# Altium PCB CORE_Prototype_1.PcbDoc
Units mil, origin at the board's own origin, x right, y up, seen from the top; angles counter-clockwise.
Board outline 1058.99 x 1049 mil, 2 copper layers (Top Layer, Bottom Layer); 29 components, 32 nets, 198 pads, 67 vias.
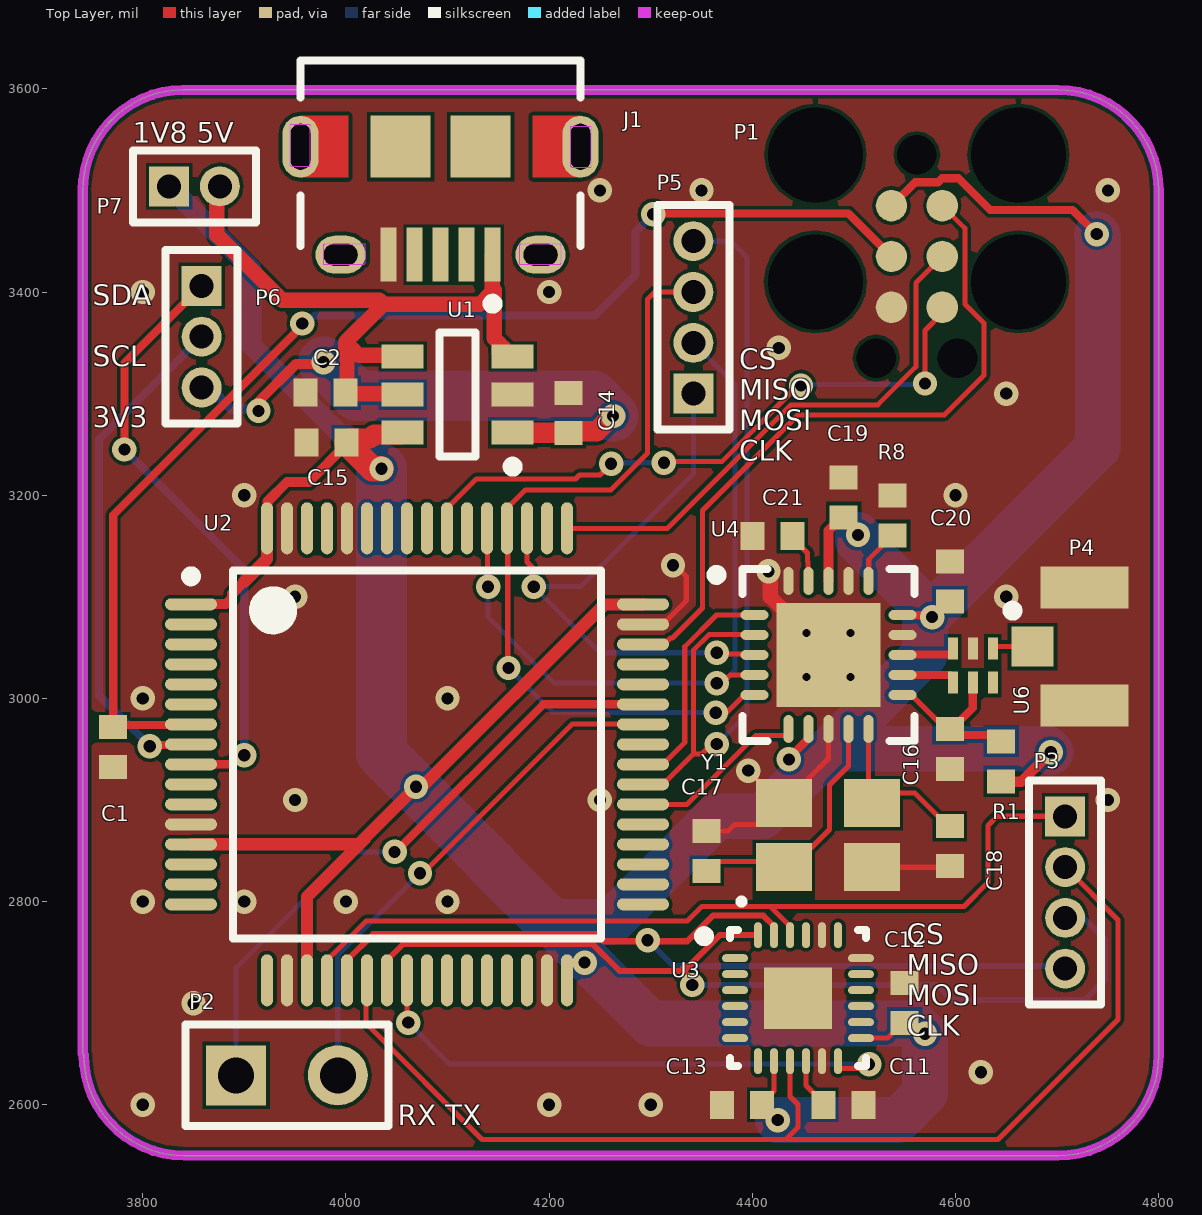
[diagram p0: Top Layer view]
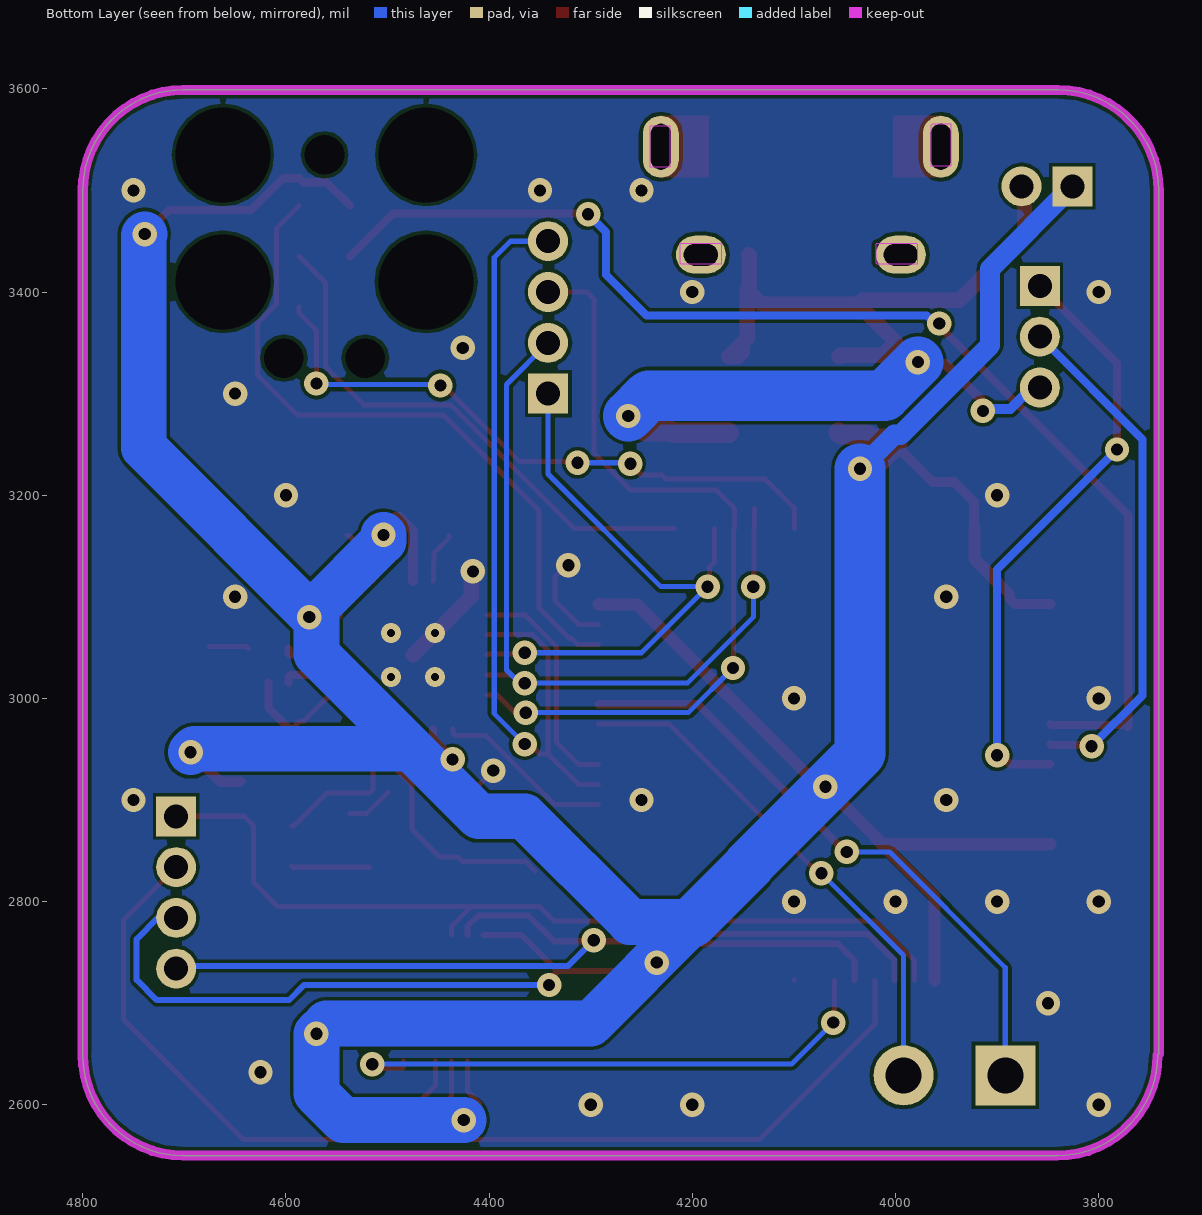
[diagram p1: Bottom Layer view, seen from below]
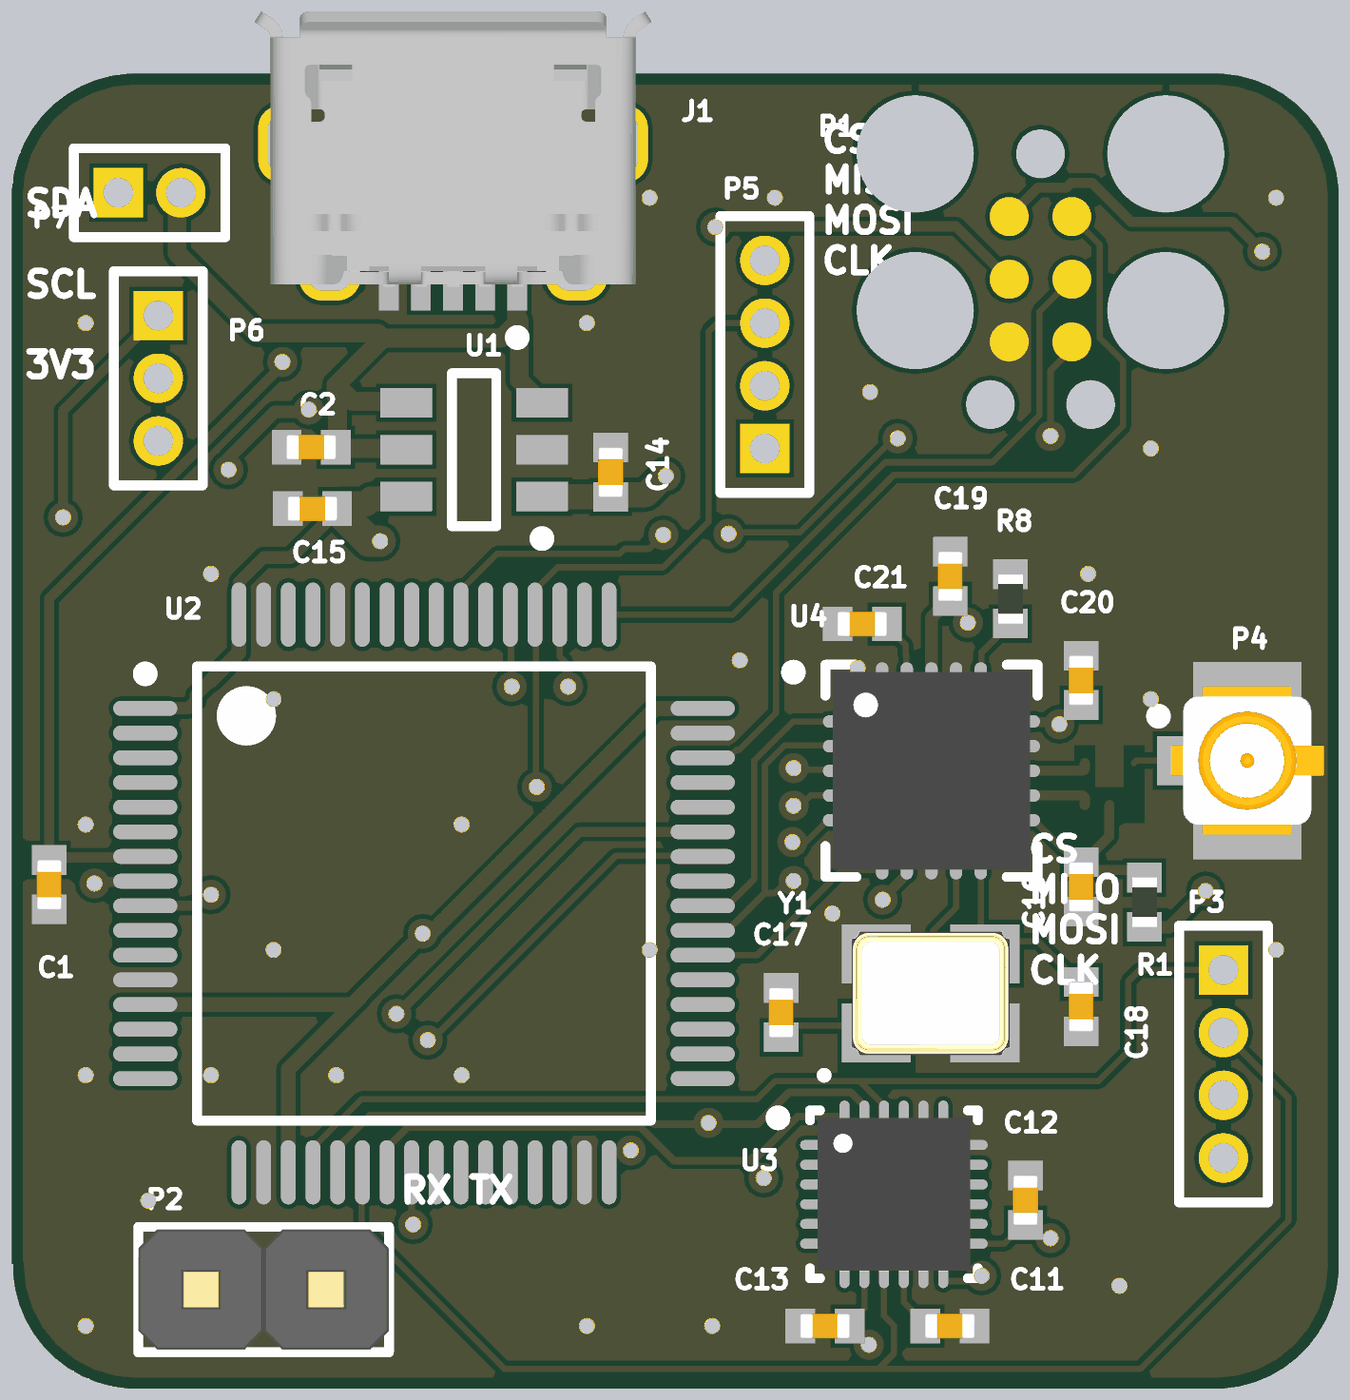
[diagram p2: 3D render of the assembled board from above, using the file's embedded part models]

## Layer stack, top to bottom
Top Solder: solder mask 0.4, Solder Resist, Dk 3.5
Top Layer: signal copper 1.4
Dielectric 1: dielectric 12.6, FR-4, Dk 4.8
Bottom Layer: signal copper 1.4
Bottom Solder: solder mask 0.4, Solder Resist, Dk 3.5

## Board outline
3741.01,2649.99 3741.01,3500.01 cw(c3840,3500.01) 3840,3599 3840.01,3598.99 4701.01,3598.99 cw(c4701.01,3500) 4800,3500 4799.99,3499.99 4799.99,2648.99 cw(c4701,2648.99) 4701,2550 4700.99,2550.01 3840.99,2550.01 cw(c3840.99,2649)

## Design rules (kind name [scope] priority, off if disabled: settings)
Clearance [All] p1: gap=3.5 ignorepadtopadclearanceinfootprint=FALSE
HoleToHoleClearance [All] p1: gap=0 allowstackedmicrovias=TRUE
MinimumSolderMaskSliver [All] p1: minsoldermaskwidth=0
PolygonConnect [All] p1: connectstyle=Direct reliefconductorwidth=10 reliefentries=4 polygonreliefangle="90 Angle" airgapwidth=10
RoutingVias [All] p1: holewidth=12 width=24 viastyle="Through Hole" minholewidth=12 minwidth=24 maxholewidth=28 maxwidth=50
SilkToSilkClearance [All] p1: silktosilkclearance=0
SilkToSolderMaskClearance [IsPad] p1: minsilkscreentomaskgap=0 clearancetoexposedcopper=TRUE
SolderMaskExpansion [All] p1: expansion=0
Width [All] p1: maxlimit=250 minlimit=5 preferedwidth=5
26 further rules are at their usual default settings.

## Classes and differential pairs
component class U_RADIO_nRF24L01: C16 C17 C18 C19 C20 C21 P4 P5 R1 R8 U4 U6 Y1
component class U_MAIN_STM32L476RGT6: C1 C2 C14 C15 J1 P1 P2 P6 P7 U1 U2
component class U_ACC_ICM20948: C11 C12 C13 P3 U3

## Components (designator, comment, footprint, x,y, rotation, side; value= is the part's Value field where it differs from the comment)
C1 "Cap" CAPC1005N 3771,2952 r90 top value=0.1uF
C2 "Cap" CAPC1005N 3980,3301 r0 top value=1uF
C11 "Cap" CAPC1005N 4489.69,2600 r180 top value=0.1uF
C12 "Cap" CAPC1005N 4550,2700.32 r270 top value=0.1uF
C13 "Cap" CAPC1005N 4390,2600 r0 top value=0.1uF
C14 "Cap" CAPC1005N 4219,3281 r270 top value=1uF
C15 "Cap" CAPC1005N 3981,3252 r0 top value=1uF
C16 "Cap" CAPC1005N 4594.37,2950.31 r90 top value=2.2nF
C17 "Cap" CAPC1005N 4355,2850 r270 top value=15pF
C18 "Cap" CAPC1005N 4594.37,2854.68 r90 top value=15pF
C19 "Cap" CAPC1005N 4490,3198 r270 top value=10nF
C20 "Cap" CAPC1005N 4594.37,3115 r270 top value=1nF
C21 "Cap" CAPC1005N 4419.68,3160 r0 top value=33nF
J1 "10118194-0001LF" FCI-10118194-0001LF-5_V 4093.2,3489.85 r180 top
P1 "DNI" TC2030 4562,3535 r270 top
P2 "Header 2" HDR1X2-PINS 3892,2629 r0 top
P3 "MHDR1X4" MHDR1X4 4708,2884 r270 top
P4 "BNC" MCB3-V4 4727,3051 r270 top
P5 "MHDR1X4" MHDR1X4 4342,3300 r90 top
P6 "MHDR1X3" MHDR1X3 3858,3406 r270 top
P7 "MHDR1X2" MHDR1X2 3826,3504 r0 top
R1 "Res1" RESC1005N 4645,2938 r270 top value=0
R8 "Res" RESC1005N 4538.03,3180 r270 top value=22k
U1 "AP7312-1833W6-7" SOT95P285X145-6N 4110,3299 r180 top
U2 "STM32L476RGT6" STM-LQFP64_N 4070,2945 r0 top
U3 "ICM-20948" TDK-QFN-24_L 4445,2705 r0 top
U4 "NRF24L01P-T" NRSC-QFN-20_L 4475,3042.83 r0 top
U6 "2450BM14A0002T" 2450BM14A0002 5325.66,3157.27 r0 top
Y1 "XTAL_4SMD" XTAL3225-4-N 4474.37,2865 r0 top

## Footprints (in the part's own frame and the unit in brackets; to place one, negate y for a bottom-side part, rotate by r counter-clockwise, add the part's x,y. Pads: shape width x height; smd on the part's side, far side on the other; paste and mask are expansions set on the pad)
2450BM14A0002 [mm]
  rect 0.25x0.55 smd: 1(-17.5,-2.75) 2(-18,-2.75) 3(-18.5,-2.75) 4(-18.5,-3.6) 5(-18,-3.6) 6(-17.5,-3.6)
CAPC1005N [mm] "Chip Capacitor (0402), Body 1.0x0.5mm, IPC Medium Density"
  rect 0.6x0.7 smd: 1(-0.5,0) 2(0.5,0)
  body extent -0.51,-0.26 0.51,0.26, height 0.61
FCI-10118194-0001LF-5_V [mm] "SMD, 5-Leads, Body 7x5mm, Pitch 0.65 mm"
  rect 0.4x1.35 smd: 1(-1.3,1.35) 2(-0.65,1.35) 3(0,1.35) 4(0.65,1.35) 5(1.3,1.35)
  oval 1.25x0.95 hole 0.55 slot 0.85 at 0 deg: 6(-2.5,1.35) 7(2.5,1.35)
  oval 0.9x1.55 hole 0.5 slot 1.15 at 90 deg: 8(-3.5,-1.35) 9(3.5,-1.35)
  rect 1.5x1.55 smd: 10(-1,-1.35) 11(1,-1.35)
  Top Layer region: -2.3,-2.125 -2.3,-0.575 -3.5,-0.575 -3.5,-2.125
  Top Layer region: 3.5,-2.125 3.5,-0.575 2.3,-0.575 2.3,-2.125
  silkscreen extent -3.5,-3.5 3.5,2.7, body extent -4.02,-4.03 4.02,1.55, height 2.72
HDR1X2-PINS [mm] "Connector; Header; 2 Position"
  rect 1.5x1.5 hole 0.9: 1(0,0)
  round 1.5 hole 0.9: 2(2.54,0)
  silkscreen extent -1.27,-1.27 3.81,1.27, body extent -1.27,-1.22 3.81,1.22, height 10.3
MCB3-V4 [mm] "Connector; RF Coaxial, MCB SM; 4 Position; Vertical, Body 3.1x3.0mm (LxW)"
  rect 1x1.05 smd: 1(0,-1.3)
  rect 1.05x2.2 smd: 2(-1.475,0) 2(1.475,0)
  silkscreen extent -1.02,-1.92 -0.78,-1.67, body extent -1.5,-1.55 1.5,1.55, height 1.25
MHDR1X2 [mm] "Connector; Header; 2 Position"
  rect 1x1 hole 0.6: 1(0,0)
  round 1 hole 0.6: 2(1.27,0)
  silkscreen extent -0.9,-0.9 2.17,0.9
MHDR1X3 [mm] "Connector; Header; 3 Position"
  rect 1x1 hole 0.6: 1(0,0)
  round 1 hole 0.6: 2(1.27,0) 3(2.54,0)
  silkscreen extent -0.9,-0.9 3.44,0.9
MHDR1X4 [mm] "Connector; Header; 4 Position"
  rect 1x1 hole 0.6: 1(0,0)
  round 1 hole 0.6: 2(1.27,0) 3(2.54,0) 4(3.81,0)
  silkscreen extent -0.9,-0.9 4.71,0.9
NRSC-QFN-20_L [mm] "QFN, 20-Leads, Body 4x4mm, Pitch 0.5mm, Thermal Pad 2.6x2.6mm, IPC High Density"
  oval 0.7x0.25 smd: 1(-1.85,1) 2(-1.85,0.5) 3(-1.85,0) 4(-1.85,-0.5) 5(-1.85,-1) 11(1.85,-1) 12(1.85,-0.5) 13(1.85,0) 14(1.85,0.5) 15(1.85,1)
  oval 0.25x0.7 smd: 6(-1,-1.85) 7(-0.5,-1.85) 8(0,-1.85) 9(0.5,-1.85) 10(1,-1.85) 16(1,1.85) 17(0.5,1.85) 18(0,1.85) 19(-0.5,1.85) 20(-1,1.85)
  rect 2.6x2.6 smd: 21(0,0)
  silkscreen extent -2.92,-2.15 2.15,2.15, body extent -2,-2 2,2, height 0.95
RESC1005N [mm] "Chip Resistor, Body 1.1x0.5mm, IPC Medium Density"
  rect 0.6x0.7 smd: 1(-0.5,0) 2(0.5,0)
  body extent -0.5,-0.25 0.5,0.25, height 0.35
SOT95P285X145-6N [mm] "SOT23, 6-Leads, Body 3.00x2.85mm, Pitch 0.95mm, IPC Medium Density"
  rect 1.05x0.6 smd: 1(-1.375,0.95) 2(-1.375,0) 3(-1.375,-0.95) 4(1.375,-0.95) 5(1.375,0) 6(1.375,0.95)
  silkscreen extent -1.5,-1.55 0.45,1.92, body extent -0.85,-1.55 0.85,1.55, height 1.45
STM-LQFP64_N [mm] "QFP, 64-Leads, Body 10x10mm, Pitch 0.5mm, IPC Medium Density"
  oval 1.3x0.3 smd: 1(-5.65,3.75) 2(-5.65,3.25) 3(-5.65,2.75) 4(-5.65,2.25) 5(-5.65,1.75) 6(-5.65,1.25) 7(-5.65,0.75) 8(-5.65,0.25) 9(-5.65,-0.25) 10(-5.65,-0.75) 11(-5.65,-1.25) 12(-5.65,-1.75) 13(-5.65,-2.25) 14(-5.65,-2.75) 15(-5.65,-3.25) 16(-5.65,-3.75) 33(5.65,-3.75) 34(5.65,-3.25) 35(5.65,-2.75) 36(5.65,-2.25) 37(5.65,-1.75) 38(5.65,-1.25) 39(5.65,-0.75) 40(5.65,-0.25) 41(5.65,0.25) 42(5.65,0.75) 43(5.65,1.25) 44(5.65,1.75) 45(5.65,2.25) 46(5.65,2.75) 47(5.65,3.25) 48(5.65,3.75)
  oval 0.3x1.3 smd: 17(-3.75,-5.65) 18(-3.25,-5.65) 19(-2.75,-5.65) 20(-2.25,-5.65) 21(-1.75,-5.65) 22(-1.25,-5.65) 23(-0.75,-5.65) 24(-0.25,-5.65) 25(0.25,-5.65) 26(0.75,-5.65) 27(1.25,-5.65) 28(1.75,-5.65) 29(2.25,-5.65) 30(2.75,-5.65) 31(3.25,-5.65) 32(3.75,-5.65) 49(3.75,5.65) 50(3.25,5.65) 51(2.75,5.65) 52(2.25,5.65) 53(1.75,5.65) 54(1.25,5.65) 55(0.75,5.65) 56(0.25,5.65) 57(-0.25,5.65) 58(-0.75,5.65) 59(-1.25,5.65) 60(-1.75,5.65) 61(-2.25,5.65) 62(-2.75,5.65) 63(-3.25,5.65) 64(-3.75,5.65)
  silkscreen extent -5.77,-4.6 4.6,4.6, body extent -5,-5 5,5, height 1.6
TC2030 [mil]
  round 31 smd paste-100: 1(50,-25) 2(50,25) 3(100,-25) 4(100,25) 5(150,-25) 6(150,25)
  round 0 hole 93.5 unplated paste+0: MH(0,100) MH(0,-100) MH(125,100) MH(125,-100)
  round 0 hole 39 unplated paste+0: MH(0,0) MH(200,-40) MH(200,40)
TDK-QFN-24_L [mm] "QFN, 24-Leads, Body 3.10x3.10mm, Pitch 0.40mm, Thermal Pad 1.70x1.54mm, IPC High Density"
  oval 0.65x0.2 smd: 1(-1.575,1) 2(-1.575,0.6) 3(-1.575,0.2) 4(-1.575,-0.2) 5(-1.575,-0.6) 6(-1.575,-1) 13(1.575,-1) 14(1.575,-0.6) 15(1.575,-0.2) 16(1.575,0.2) 17(1.575,0.6) 18(1.575,1)
  oval 0.2x0.65 smd: 7(-1,-1.575) 8(-0.6,-1.575) 9(-0.2,-1.575) 10(0.2,-1.575) 11(0.6,-1.575) 12(1,-1.575) 19(1,1.575) 20(0.6,1.575) 21(0.2,1.575) 22(-0.2,1.575) 23(-0.6,1.575) 24(-1,1.575)
  rect 1.7x1.54 smd: 25(0,0)
  silkscreen extent -2.47,-1.7 1.7,1.7, body extent -1.55,-1.55 1.55,1.55, height 1.05
XTAL3225-4-N [mm]
  rect 1.4x1.2 smd: 1(-1.101,-0.791) 2(1.099,-0.791) 3(1.099,0.809) 4(-1.101,0.809)
  silkscreen extent -2.21,-1.7 -2.11,-1.6, body extent -1.61,-1.25 1.61,1.27, height 0.6

## Part data
C1 C2 C11 C12 C13 C14 C15 C16 C17 C18 C19 C20 C21: "Capacitor", LatestRevisionDate=17-Jul-2002, LatestRevisionNote="Re-released for DXP Platform.", PackageDescription="Radial Cap, Thru-Hole; 2 Leads; 0.3 in Pin Spacing", PackageReference=RAD-0.3, Published=8-Jun-2000, Publisher="Altium Limited"
J1: library part CMP-2000-05120-1, "Micro USB B Type Receptacle, 1.8 A, -55 to 85 degC, 5-Pin SMD, RoHS, Tape and Reel", Manufacturer="Amphenol FCI", Package Description="5-Pin Surface Mount Device, Body 8.05 x 5.53 mm, Pitch 0.65 mm", Package Reference=10118194-0001LF-5, Body Orientation=RightAngle, Datasheet URL=https://datasheet.ciiva.com/26945/getdatasheetpartid-418619-26945695.pdf, Datasheet Version="Rev. A, 10/2011", Gender=RCP, Manufacturer URL=http://www.fci.com/, Mounting=SurfaceMount, Number of Contacts=5, Packaging=CutTape, Pitch=0.65mm, Rad Hard=No, Termination Method=Solder, Type=MicroUSBTypeB
P1: library part TC2030-CTX
P2 P7: "Header, 2-Pin", LatestRevisionDate=17-Jul-2002, LatestRevisionNote="Re-released for DXP Platform.", Publisher="Altium Limited"
P3 P5: "Header, 4-Pin", LatestRevisionDate=17-Jul-2002, LatestRevisionNote="Re-released for DXP Platform.", Publisher="Altium Limited"
P4: "BNC Elbow Connector", LatestRevisionDate=17-Jul-2002, LatestRevisionNote="Re-released for DXP Platform.", Publisher="Altium Limited"
P6: "Header, 3-Pin", LatestRevisionDate=17-Jul-2002, LatestRevisionNote="Re-released for DXP Platform.", Publisher="Altium Limited"
R1: "Resistor", LatestRevisionDate=17-Jul-2002, LatestRevisionNote="Re-released for DXP Platform.", PackageDescription="Axial Device, Thru-Hole; 2 Leads; 0.3 in Pin Spacing", PackageReference=AXIAL-0.3, Published=8-Jun-2000, Publisher="Altium Limited"
R8: library part Res1, "Resistor", LatestRevisionDate=17-Jul-2002, LatestRevisionNote="Re-released for DXP Platform.", PackageDescription="Axial Device, Thru-Hole; 2 Leads; 0.3 in Pin Spacing", PackageReference=AXIAL-0.3, Published=8-Jun-2000, Publisher="Altium Limited"
U1: "IC REG LINEAR 1.8V/3.3V SOT26", Case/Package=SOT-26, Current - Output 1=150mA, Dropout Voltage=150mV, Manufacturer 1=Diodes, Max Input Voltage=6V, Max Operating Temperature=85°C, Max Power Dissipation=950mW, Min Current Limit=200mA, Min Input Voltage=2V, Min Operating Temperature=-40°C, Operating Supply Current=60uA, Output Voltage=3.3V, Output Voltage Accuracy=2%, Package Quantity=3000, Power Supply Rejection Ratio (PSRR)=65dB, Quiescent Current=80uA, Reference Voltage=800mV, Supplier Part Number 1=AP7312-1833W6-7DICT-ND, Voltage - Output 1=1.8V, Accuracy=2%, ComponentLink1Description=https://datasheet.ciiva.com/30477/0900766b8115c2c0-30477178.pdf?src-supplier=RSComponents, ComponentLink1URL=https://datasheet.ciiva.com/30477/0900766b8115c2c0-30477178.pdf?src-supplier=RSComponents, ComponentLink2Description=https://datasheet.ciiva.com/8078/1636610-8078247.pdf?src-supplier=Element14, ComponentLink2URL=https://datasheet.ciiva.com/8078/1636610-8078247.pdf?src-supplier=Element14, ComponentLink3Description=https://datasheet.ciiva.com/8239/ap7312-8239997.pdf?src-supplier=Avnet, ComponentLink3URL=https://datasheet.ciiva.com/8239/ap7312-8239997.pdf?src-supplier=Avnet, Contact Plating=Tin,Matte, Current - Output 2=150mA, Height=1.3mm, Lead Free="Lead Free", Length=3.1mm, Manufacturer Part Number 1=AP7312-1833W6-7, Max Output Current=150mA, Mount="Surface Mount", Number of Outputs=2, Number of Pins=6, Number of Regulators=2, Output Current=150mA, Output Type=Fixed, Packaging="Tape and Reel", Polarity=Positive, Power Dissipation=950mW, Power Rating=950mW, Pricing 1="1=0.59000, 10=0.52100, 100=0.37100, 500=0.29994, 1000=0.22890 (USD)", Radiation Hardening=No, REACH SVHC="No SVHC", RoHS=Yes, Stock 1=17585, Supplier 1=Digi-Key, Voltage - Output 2=3.3V, Width=1.7mm
U2: library part CMP-1655-00012-2, "Ultra-Low-Power ARM Cortex-M4 32-bit MCU+FPU, 1024 KB Flash, 128 KB Internal RAM, 51 I/Os, 64-Pin LQFP, -40 to 85 degC, Tray", I/Os (High Current)=51, Manufacturer=STMicroelectronics, Operating Frequency(F) (Processor speed) (MHz)=80, Package Description="64-Pin Low-profile Quad Flat Package, Body 10 x 10 mm, Pitch 0.5 mm", Package Reference=LQFP64, Supply Voltage(Vcc) min (V)=1.71, ComponentLink1Description="Manufacturer URL", ComponentLink1URL=http://www.st.com/, ComponentLink2Description=Datasheet, ComponentLink2URL=http://www.st.com/st-web-ui/static/active/en/resource/technical/document/datasheet/DM00108832.pdf, Core="ARM Cortex-M4", D/A Converter=2, DatasheetVersion="Rev. 4", FLASH Size (Prog) (kB)=1024, Internal RAM Size (kB)=128, Mounting Technology="Surface Mount", Packing=Tray, PartNumber=STM32L476RGT6
U3: library part CMP-2000-07532-1, "World’s Lowest Power 9-Axis MEMS MotionTracking(TM) Device, 1.71 to 3.6 V, -40 to 85 degC, 24-Pin QFN, RoHS, Tape and Reel", Manufacturer=TDK, Package Description="24-Pin Quad Flat No-lead Package, Body 3 x 3 mm, Pitch 0.4 mm", Package Reference=QFN-24, Datasheet URL=https://www.invensense.com/wp-content/uploads/2016/06/DS-000189-ICM-20948-v1.3.pdf, Datasheet Version="Rev. 1.3, 06/2017", Manufacturer URL=http://www.tdk.com/, Mounting Technology=SurfaceMount
U4: library part CMP-2000-06859-1, "Single Chip Transceiver, 2.4 GHz, 60 mW, 1.9 to 3.6 V, -40 to 85 degC, 20-Pin QFN, RoHS, Tray", Current - Receiving=12.6mA~13.5mA, Current - Transmitting=7mA~11.3mA, Frequency=2.4GHz, Manufacturer="Nordic Semiconductor", Operating Temperature=-40°C~85°C, Package / Case=20-VFQFNExposedPad, Package Description="20-Pin Quad Flat No-lead Package, Body 4 x 4 mm, Pitch 0.5 mm", Package Reference=QFN20, Power - Output=0dBm, Standard Package=490, Voltage - Supply=1.9V~3.6V, Category=RF/IFandRFID, Data Rate (Max)=2Mbps, Datasheet URL=http://www.nordicsemi.com/eng/content/download/2726/34069/file/nRF24L01P_Product_Specification_1_0.pdf, Datasheet Version="Rev. 1.0, 09/2008", Design Resources=DevelopmentToolSelector, Family=RFTransceiverICs, For Use With=1490-1002-ND-KITEVALUATIONNRF24L01P1568-1295-ND-SPARKFUNTRANSCEIVERBREAKOUT-1568-1296-ND-SPARKFUNTRANSCEIVERBREAKOUT-1471-1410-ND-DEVBOARDNRFSCLICKNRF24L01P-MODULE-PCB-ND-KITEVALNRF24L01+PCBANTENNANRF24L01P-MODULE-SMA-ND-KITEVALNRF24L01+SMACONNNRF24L01P-UPGRADE-ND-UPGRADE2PCB/1SMANRF24L01103990038-ND-DEVDUINOSENSORNODEV1.3103990053-ND-DEVDUINOSENSORNODEV2(ATMEGA103990074-ND-DEVDUINOSENSORNODE106990026-ND-ENERGYMONITORSHIELDV2113990088-ND-WIRELESSGATESHIELD113990095-ND-DEVDUINOSENSORNODEV3(ATMEGA106030001-ND-ENERGYMONITORSHIELD1597-1361-ND-DEVDUINOSENSORNODEV2.2(ATMEG105990030-ND-RGBWSTRIPWIRELESSSHIELDV1.0, GPIO=-, Manufacturer URL=http://www.nordicsemi.com/eng/Products/, Memory Size=-, Modulation=GFSK, Mounting Technology=SurfaceMount, Online Catalog=nRF24L01+, Other Names=1490-1019, Packaging=Tray, Protocol=-, RF Family/Standard=GeneralISM>1GHZ, Sensitivity=-94dBm, Serial Interfaces=SPI, Series=-, Type=TxRxOnly
U6: "JOHANSON TECHNOLOGY - 2450BM14A0002T - BALUN, 2.45GHZ, IMPEDANCE MATCHED", Case/Package=0603, Case Code (Metric)=1608, Frequency=2.45GHz, Manufacturer 1=Johanson, Max Frequency=2.5GHz, Max Operating Temperature=85°C, Min Operating Temperature=-40°C, Package Quantity=4000, Supplier Part Number 1=712-1574-1-ND, Case Code (Imperial)=0603, ComponentLink1Description=https://datasheet.ciiva.com/7662/1644648-7662569.pdf?src-supplier=Element14, ComponentLink1URL=https://datasheet.ciiva.com/7662/1644648-7662569.pdf?src-supplier=Element14, ComponentLink2Description=https://datasheet.ciiva.com/29655/balun-filter-matched-2450bm14a0002-v2-29655610.pdf?src-supplier=Digi-Key, ComponentLink2URL=https://datasheet.ciiva.com/29655/balun-filter-matched-2450bm14a0002-v2-29655610.pdf?src-supplier=Digi-Key, ComponentLink3Description=https://datasheet.ciiva.com/24023/2450bm14a0002t-247800-24023183.pdf?src-supplier=Mouser, ComponentLink3URL=https://datasheet.ciiva.com/24023/2450bm14a0002t-247800-24023183.pdf?src-supplier=Mouser, Contact Plating=Tin,Matte, Impedance=50R, Insertion Loss=2dB, Manufacturer Part Number 1=2450BM14A0002T, Mount="Surface Mount", Number of Pins=6, Packaging="Tape and Reel", Pricing 1="1=0.94000, 10=0.83000, 25=0.74960, 100=0.65600, 250=0.57568, 500=0.50872, 1000=0.40163 (USD)", REACH SVHC=Unknown, Return Loss=9.5dB, RoHS=Yes, Stock 1=68815, Supplier 1=Digi-Key, Termination=SMD/SMT
Y1: "Crystal Oscillator (4 pin)", LatestRevisionDate=17-Jul-2002, LatestRevisionNote="Re-released for DXP Platform.", PackageDescription="Crystal, Thru-Hole; 2 Leads; Body 3.1 x 8.2 mm (Dia.xH)", PackageReference=R38, Published=8-Jun-2000, Publisher="Altium Limited"

## Via types
v1: diameter 24, hole 12, Top Layer to Bottom Layer, tented both sides, 63 vias
v2: diameter 19.68, hole 7.87, Top Layer to Bottom Layer, 4 vias

## Nets (pads, with @x,y where several pads share a name; then routed paths per layer and width w, separated by ;. In a path a pad name is that pad's centre, name@x,y a point inside that pad or via, vN(x,y) a via of type N, cw(c..) or ccw(c..) an arc to the next point about the centre after c; other vN are vias at no path point)
1V8D: C12.2 C13.2 C15.2 C19.2 C20.2 P1.1 P7.1 R1.2 U1.6 U2.1 U2.13 U2.19 U2.32 U2.48 U2.64 U3.8 U3.13 U4.7 U4.15 U4.18 | length 4431.3
  Top Layer w5: C13.2 4409.69,2601.97 4421.38,2613.66 U3.8 ; U3.13 4533.03,2665.63 4548.03,2680.63 C12.2
  Top Layer w8: v1(4436,2940) 4436,2941.33 4455.31,2960.64 U4.7 ; P1.1 4560,3508 4582.61,3508 4586.61,3512 4603,3512 4634.25,3480.75 4715.25,3480.75 v1(4739,3457) ; U4.15 4548.19,3081.85 4575.15,3081.85 v1(4577,3080) 4577.09,3080 4592.4,3095.31 C20.2
  Top Layer w10: U2.1 3847.91,3092.98 3882.14,3092.98 3888,3098.84 3888,3103 3899.69,3114.69 ; U2.64 3922.71,3167.79 3922.71,3193.71 3942,3213 3963.65,3213 4000.69,3250.03 C15.2@4000.69,3251.41 ; U4.18 4475,3165.28 4488.03,3178.31 C19.2 4491.97,3178.31 C19.2@4501.32,3168.96 ; R1.2 4645.31,2918 4664.8,2918 v1(4693.8,2947)
  Top Layer w12: U2.13 4012.42,2856.42 v1(4069,2913) 4075,2913 4254.54,3092.54 4292.35,3092.54 U2.48 ; 3899.69,3114.69 3922.27,3137.27 3922.27,3167.35 U2.64 ; U2.19 3961.73,2804.73 4018.79,2861.79
  Top Layer w20: C15.2 4000.69,3253.97 4002.5,3255.78 4023.78,3255.78 4027.79,3259.79 4054.06,3259.79 U1.6
  Top Layer w25: C15.2 4000.69,3251.41 4026.09,3226 v1(4035,3226)
  Bottom Layer w20: P7.1 3907,3423 3907,3347.55 3995.05,3259.5 4001.5,3259.5 v1(4035,3226)
  Bottom Layer w45: v1(4425,2585) 4543.64,2585 4570,2611.36 v1(4570,2670) 4560,2680 4300,2680 4200,2780 4261.26,2780 4365.26,2884 4410.16,2884 4476.58,2950.42 ; v1(4504,3161) 4504,3155 v1@4570,3089 ; v1(4693.8,2947) 4690.38,2950.42 4476.58,2950.42 ; v1(4739,3457) 4740,3456 4740,3247 4570,3077 4570,3043.84 4476.58,2950.42
  Bottom Layer w50: v1(4035,3226) 4035,2946 4144.36,2836.64 4144.36,2835.64 4200,2780
  other v1: 4235,2740
3V3: C14.2 P6.3 U1.1 | length 568.1
  Top Layer w10: v1(3914,3283) 3913.49,3283.51 3913.49,3291.79 3951,3329.3 3976.3,3329.3 v1(3978,3331)
  Top Layer w20: U1.1 4164.28,3261.46 4218.86,3261.46 C14.2 4220.81,3263.13 4247.04,3263.13 4261.92,3278 v1(4263,3278)
  Bottom Layer w10: P6.3 3865.95,3306 3887,3284.95 3912.05,3284.95 v1(3914,3283)
  Bottom Layer w50: v1(3978,3331) 4011,3298 4243,3298 v1(4263,3278)
ANT1_5: U4.12 U6.4 | length 56.1
  Top Layer w8: U4.12 4595.61,3023.15 4597.31,3021.44 U6.4
ANT2_5: U4.13 U6.3 | length 54.9
  Top Layer w8: U4.13 4548.19,3043.19 4596.39,3043.19 4597.31,3044.11 U6.3
CE: U2.40 U4.1 | length 226
  Top Layer w5: U2.40 4312.13,2935.16 4333.5,2956.53 4333.5,3050.98 4364.73,3082.2 U4.1
DVDD_5: C21.2 U4.19 | length 50.9
  Top Layer w5: C21.2 4439.37,3158.03 4454.37,3143.03 4454.37,3135 4454.96,3134.41 4454.96,3116.02 U4.19
GND: C1.1 C2.1 C11.1 C12.1 C13.1 C14.1 C15.1 C16.1 C17.1 C18.1 C19.1 C20.1 C21.1 J1.5 P1.5 P4.2 R8.1 U1.2 U2.12 U2.18 U2.31 U2.47 U2.60 U2.63 U3.11 U3.18 U3.20 U3.25 U4.8 U4.14 U4.17 U4.20 U4.21 U6.2 Y1.2 Y1.4 | length 506.9
  Top Layer w5: U2.47 4312.13,3072.95 4335,3095.83 4335,3120.07 4324.07,3131 v1(4322,3131) ; C17.1 4376.28,2869.68 4382.33,2875.74 4409.89,2875.74 Y1.4 ; v1(4396,2929) 4428.14,2896.86 Y1.4 ; U4.8 4475,2940.84 4456.07,2921.92 4456.07,2917.98 4434.95,2896.86 Y1.4 ; Y1.2 4593.24,2833.87 C18.1
  Top Layer w15: v1(4416,3125) 4417.72,3123.28 4417.72,3100.11 v2(4453.35,3064.49) U4.21
  other v1: 3800,2600 4200,2600 4300,2600 4625,2632 3850,2700 3800,2800 3900,2800 4000,2800 4100,2800 3950,2900 4250,2900 4750,2900 3800,3000 4100,3000 3950,3100 4650,3100 3900,3200 4600,3200 4650,3300 4426,3345 3800,3400 4200,3400 4250,3500 4350,3500 4750,3500
  other v2: 4453.35,3021.18 4496.65,3021.18 4496.65,3064.49
I2C_SCL_4: P6.2 U2.8 | length 506.9
  Top Layer w8: v1(3807,2953) 3808.11,2954.11 3846.83,2954.11 U2.8
  Bottom Layer w8: v1(3807,2953) 3757,3003 3757,3255 P6.2
I2C_SDA_4: P6.1 U2.9 | length 598.5
  Top Layer w8: v1(3782,3245) 3782,3330 P6.1 ; U2.9 3886.83,2935.16 3895.67,2944 v1(3900,2944)
  Bottom Layer w8: v1(3782,3245) 3900,3127 v1(3900,2944)
ICM_INT: U2.24 U3.12 | length 551.5
  Top Layer w5: U2.24 4060.16,2689.47 4061.36,2688.26 v1(4061.36,2680.95) ; U3.12 4484.37,2637.14 4485.7,2635.82 4510.82,2635.82 v1(4515,2640)
  Bottom Layer w5: v1(4061.36,2680.95) 4102.31,2640 v1(4515,2640)
IREF_5: R8.2 U4.16 | length 56.4
  Top Layer w5: U4.16 4514.67,3115.96 4514.67,3136.95 R8.2 R8.2@4540,3160.32
IRQ: U2.38 U4.6 | length 176.3
  Top Layer w5: U2.38 4335.79,2895.79 4403.64,2963.64 4433.39,2963.64 4435.63,2965.88 U4.6
REGOUT_2: C11.2 U3.10 | length 50.1
  Top Layer w5: U3.10 4452.87,2619.09 4470,2601.97 C11.2
RESET_4: C1.2 P1.3 U2.7 | length 1219
  Top Layer w8: U2.7 3846.83,2973.8 3773.11,2973.8 C1.2 3771,3180.55 3957,3366.55 v1(3957,3369) ; v1(4302.59,3476.59) 4303.19,3477.19 4494.81,3477.19 P1.3
  Bottom Layer w8: v1(3957,3369) 3961.33,3369 3969.33,3377 4245,3377 4285,3417 4285,3459 v1(4302.59,3476.59)
RF_UNBAL_5: P4.1 U6.1 | length 40
  Top Layer w5: U6.1 4638.69,3051 P4.1
SPI1.CLK: P3.4 U2.21 U3.23 | length 899.8
  Top Layer w6: U2.21 4001.1,2742.24 4026.86,2768 4246.6,2768 4253.6,2761 4297,2761 4336,2761 4361.3,2786.3 4410.94,2786.3 4421.38,2775.87 U3.23
  Bottom Layer w6: v1(4297,2762) 4322.5,2736.5 4705.5,2736.5 P3.4
SPI1.CS: P3.1 U2.20 U3.22 | length 874.1
  Top Layer w5: U2.20 3981.42,2742.24 4020.17,2781 4336,2781 4350.3,2795.3 4417.69,2795.3 ; U3.22 4437.13,2775.87 4417.69,2795.3 ; P3.1 4641,2884 4632,2875 4632,2819 4608.3,2795.3 4417.69,2795.3
SPI1.MISO: P3.2 U2.22 U3.9 | length 1135.8
  Top Layer w5: U2.22 4020,2721.77 4020,2680 4134.05,2565.95 4433.02,2565.95 ; U3.9 4437.13,2608.12 4445,2600.24 4445,2577.93 4433.02,2565.95 ; P3.2 4760,2782 4760,2684 4641.95,2565.95 4433.02,2565.95
SPI1.MOSI: P3.3 U2.23 U3.24 | length 941.9
  Top Layer w6: U2.23 4040.47,2742.24 4056.73,2758.5 4242.66,2758.5 4269.29,2731.87 4332,2731.87 4341,2722.87 v1(4341,2718) ; 4332,2734.5 4335.5,2734.5 4368.01,2767.01 U3.24
  Bottom Layer w6: v1(4341,2718) 4582,2718 4597,2703 4727,2703 4747,2723 4747,2763 4726,2784 P3.3
SPI2.CLK: P5.1 U2.51 U4.3 | length 587.2
  Top Layer w5: U2.51 4178.27,3134.35 4183.12,3129.5 4183.12,3111.88 v1(4185,3110) ; v1(4365,3045) 4366.24,3043.76 4401.24,3043.76 U4.3
  Bottom Layer w5: P5.1 4342,3221 4231,3110 v1(4185,3110) 4250,3045 v1(4365,3045)
SPI2.CS: P5.4 U2.39 U4.2 | length 808.9
  Top Layer w5: U2.39 4312.13,2915.47 4342,2945.35 ; v1(4365,2955) 4359.86,2955 4350.2,2945.35 4342,2945.35 ; U4.2 4401.69,3063 4357.54,3063 4342,3047.46 4342,2945.35
  Bottom Layer w5: P5.4 4379.07,3450 4395,3434.07 4395,2985 v1(4365,2955)
SPI2.MISO: P5.3 U2.52 U4.5 | length 785.7
  Top Layer w5: v1(4160,3030) 4159.29,3030.71 4159.29,3166.73 U2.52 4158.58,3187.13 4176.67,3205.21 4260.76,3205.21 4297,3241.46 4297,3393.07 4303.93,3400 P5.3 ; v1(4364,2986) 4374.53,2986 4392,3003.46 U4.5
  Bottom Layer w5: v1(4160,3030) 4204,2986 v1(4364,2986)
SPI2.MOSI: P5.2 U2.53 U4.4 | length 762.4
  Top Layer w5: U2.53@4138.9,3187.13 U2.53 4139.45,3166.89 4139.45,3110.55 v1(4140,3110) ; v1(4365,3015) 4370.14,3015 4378.29,3023.15 U4.4
  Bottom Layer w5: v1(4140,3110) 4140,3080 4205,3015 v1(4365,3015) 4370,3015 4383,3028 4383,3309 P5.2
SWCLK_4: P1.4 U2.49 | length 528.5
  Top Layer w5: U2.49 4316.44,3167.44 4438,3289 4523.54,3289 4561,3326.46 4561,3409 P1.4
SWDIO_4: P1.2 U2.46 | length 685.4
  Top Layer w5: U2.46 4313.16,3053.27 4319.44,3059.55 4321.55,3059.55 4351,3089 4351,3185 4445,3279 4589,3279 4628,3318 4628,3369.4 4609.25,3388.15 4609.25,3462.75 P1.2
TRACESWO_4: P1.6 U2.55 | length 623.1
  Top Layer w5: U2.55 4099.53,3187.13 4128.4,3216 4226,3216 4230,3220 4250,3220 v1(4261,3231) ; v1(4313,3232) 4314,3233 4369.98,3233 4444.98,3308 v1(4448,3308) ; v1(4570,3310) 4570,3362.2 4587,3379.2 P1.6
  Bottom Layer w5: v1(4261,3231) 4262,3232 v1(4313,3232) ; v1(4448,3308) 4449,3309 4569,3309 v1(4570,3310)
UART_RX_4: P2.1 U2.43 | length 613.8
  Top Layer w8: v1(4048,2849) 4049,2849 4194.21,2994.21 U2.43
  Bottom Layer w5: P2.1 3892,2735 4006,2849 v1(4048,2849)
UART_TX_4: P2.2 U2.42 | length 514.1
  Top Layer w5: v1(4073,2828) 4076,2828 4223,2975 4291.97,2975 U2.42
  Bottom Layer w5: P2.2 3992,2747 v1(4073,2828) v1@4072,2828
VDD_PA_5: C16.2 R1.1 U4.11 U6.5 | length 172.2
  Top Layer w5: U4.11 4556.69,3003.46 4582.35,2977.81 4586.56,2977.81 C16.2
  Top Layer w8: U6.5 4617,2990.66 4596.34,2970 C16.2 4600.53,2963.84 4638.84,2963.84 R1.1
VUSB_4: C2.2 J1.1 P7.2 U1.3 U1.4 U1.5 | length 703.8
  Top Layer w15: P7.2 3873,3501 3873,3456 3937,3392 4033,3392 4037,3388 ; 4005.92,3344.45 4012.7,3337.67 4054.59,3337.67 U1.4 ; U1.5 4054.87,3300 4000.69,3300 C2.2 4001,3302.31 4001,3340.53 3999.69,3341.84 3999.69,3350.69 4037,3388 ; J1.1 4144.01,3436.33 4144.01,3400.01 ; 4037,3388 4132,3388 4144.01,3400.01 ; 4144.01,3400.01 4146,3402 4146,3354.54 4150.96,3349.57 ; 4150.96,3349.57 4155.39,3345.14 4159.7,3340.83 U1.3 4155.28,3336.4 4150.96,3340.71 4150.96,3349.57
XC1_5: C18.2 U4.10 Y1.3 | length 201.3
  Top Layer w5: Y1.3@4499.37,2907.99 4520.49,2886.87 Y1.3@4537.24,2886.87 ; U4.10 4514.37,2910.12 4517.63,2906.86 4559.91,2906.86 4592.4,2874.37 C18.2
XC2_5: C17.2 U4.9 Y1.1 | length 244.6
  Top Layer w5: C17.2 4364.31,2839.63 4426.78,2839.63 4431.02,2843.87 4448.87,2843.87 4476,2871 4476,2914.89 4494.69,2933.58 U4.9
pads on no net: J1.2 J1.3 J1.4 J1.6 J1.7 J1.8 J1.9 J1.10 J1.11 P1.MH U2.2 U2.3 U2.4 U2.5 U2.6 U2.10 U2.11 U2.14 U2.15 U2.16 U2.17 U2.25 U2.26 U2.27 U2.28 U2.29 U2.30 U2.33 U2.34 U2.35 U2.36 U2.37 U2.41 U2.44 U2.45 U2.50 U2.54 U2.56 U2.57 U2.58 U2.59 U2.61 U2.62 U3.1 U3.2 U3.3 U3.4 U3.5 U3.6 U3.7 U3.14 U3.15 U3.16 U3.17 U3.19 U3.21 U6.6
copper on no net: | length 0.3
  Top Layer w5: 4099.53,2722.56 4099.76,2722.8

## Polygon pours and split planes (outlines as drawn)
GND on Top Layer "Top Layer-GND" (solid, pour order 20): 4795,3596 4795,2553 4796,2552 3745,2552 3745,3593 3742,3596
GND on Bottom Layer "Bottom Layer-GND" (solid, pour order 22): 4795,3595 4797,3593 4792,3588 4792,2552 4793,2551 4789,2547 3740,2547 3740,3589 3746,3595

## Keep-outs
Keep-Out Layer:
  region: 5385,3405
  region: 5425,3500
  lines w1: 3945,3525 3945,3544 3945,3565 3964,3565 3965,3564 3965,3524 3946,3524 3945,3525 ; 3978,3427.5 3978,3446.5 3979,3447.5 4019,3447.5 4019,3428.5 4018,3427.5 3999,3427.5 3978,3427.5 ; 4171,3427.5 4192,3427.5 4211,3427.5 4212,3428.5 4212,3447.5 4172,3447.5 4171,3446.5 4171,3427.5 ; 4221.5,3524 4222.5,3523 4241.5,3523 4241.5,3563 4221.5,3563 4221.5,3543 4221.5,3524
  lines w10: 3741.01,2649.99 3741.01,3500.01 cw(c3840,3500.01) 3840,3599 4701.01,3598.99 cw(c4701.01,3500) 4800,3500 4799.99,2648.99 cw(c4701,2648.99) 4701,2550 3840.99,2550.01 cw(c3840.99,2649) 3742,2649

## Other copper
Top Layer:
  region net 1V8D: 3965,2778.38

## Silkscreen, mask and mechanical layers (free items; w line width, h text height)
Top Overlay:
  text "1V8 5V" at 3790,3547 h20
  text "SDA /  / SCL /  / 3V3" at 3751,3267 h20
  text "CS / MISO / MOSI / CLK" at 4387,3234 h20
  text "CS / MISO / MOSI / CLK" at 4552,2668 h20
  text "RX TX" at 4051,2580 h20

## Text inside footprints (layer, text, board x,y; h text height)
J1: Mechanical 6 "PCB EDGE" at 4376.67,3604.02 h15 r180